# Allegro board WEGUI_XX32F103C8XX_Allegro174.brd
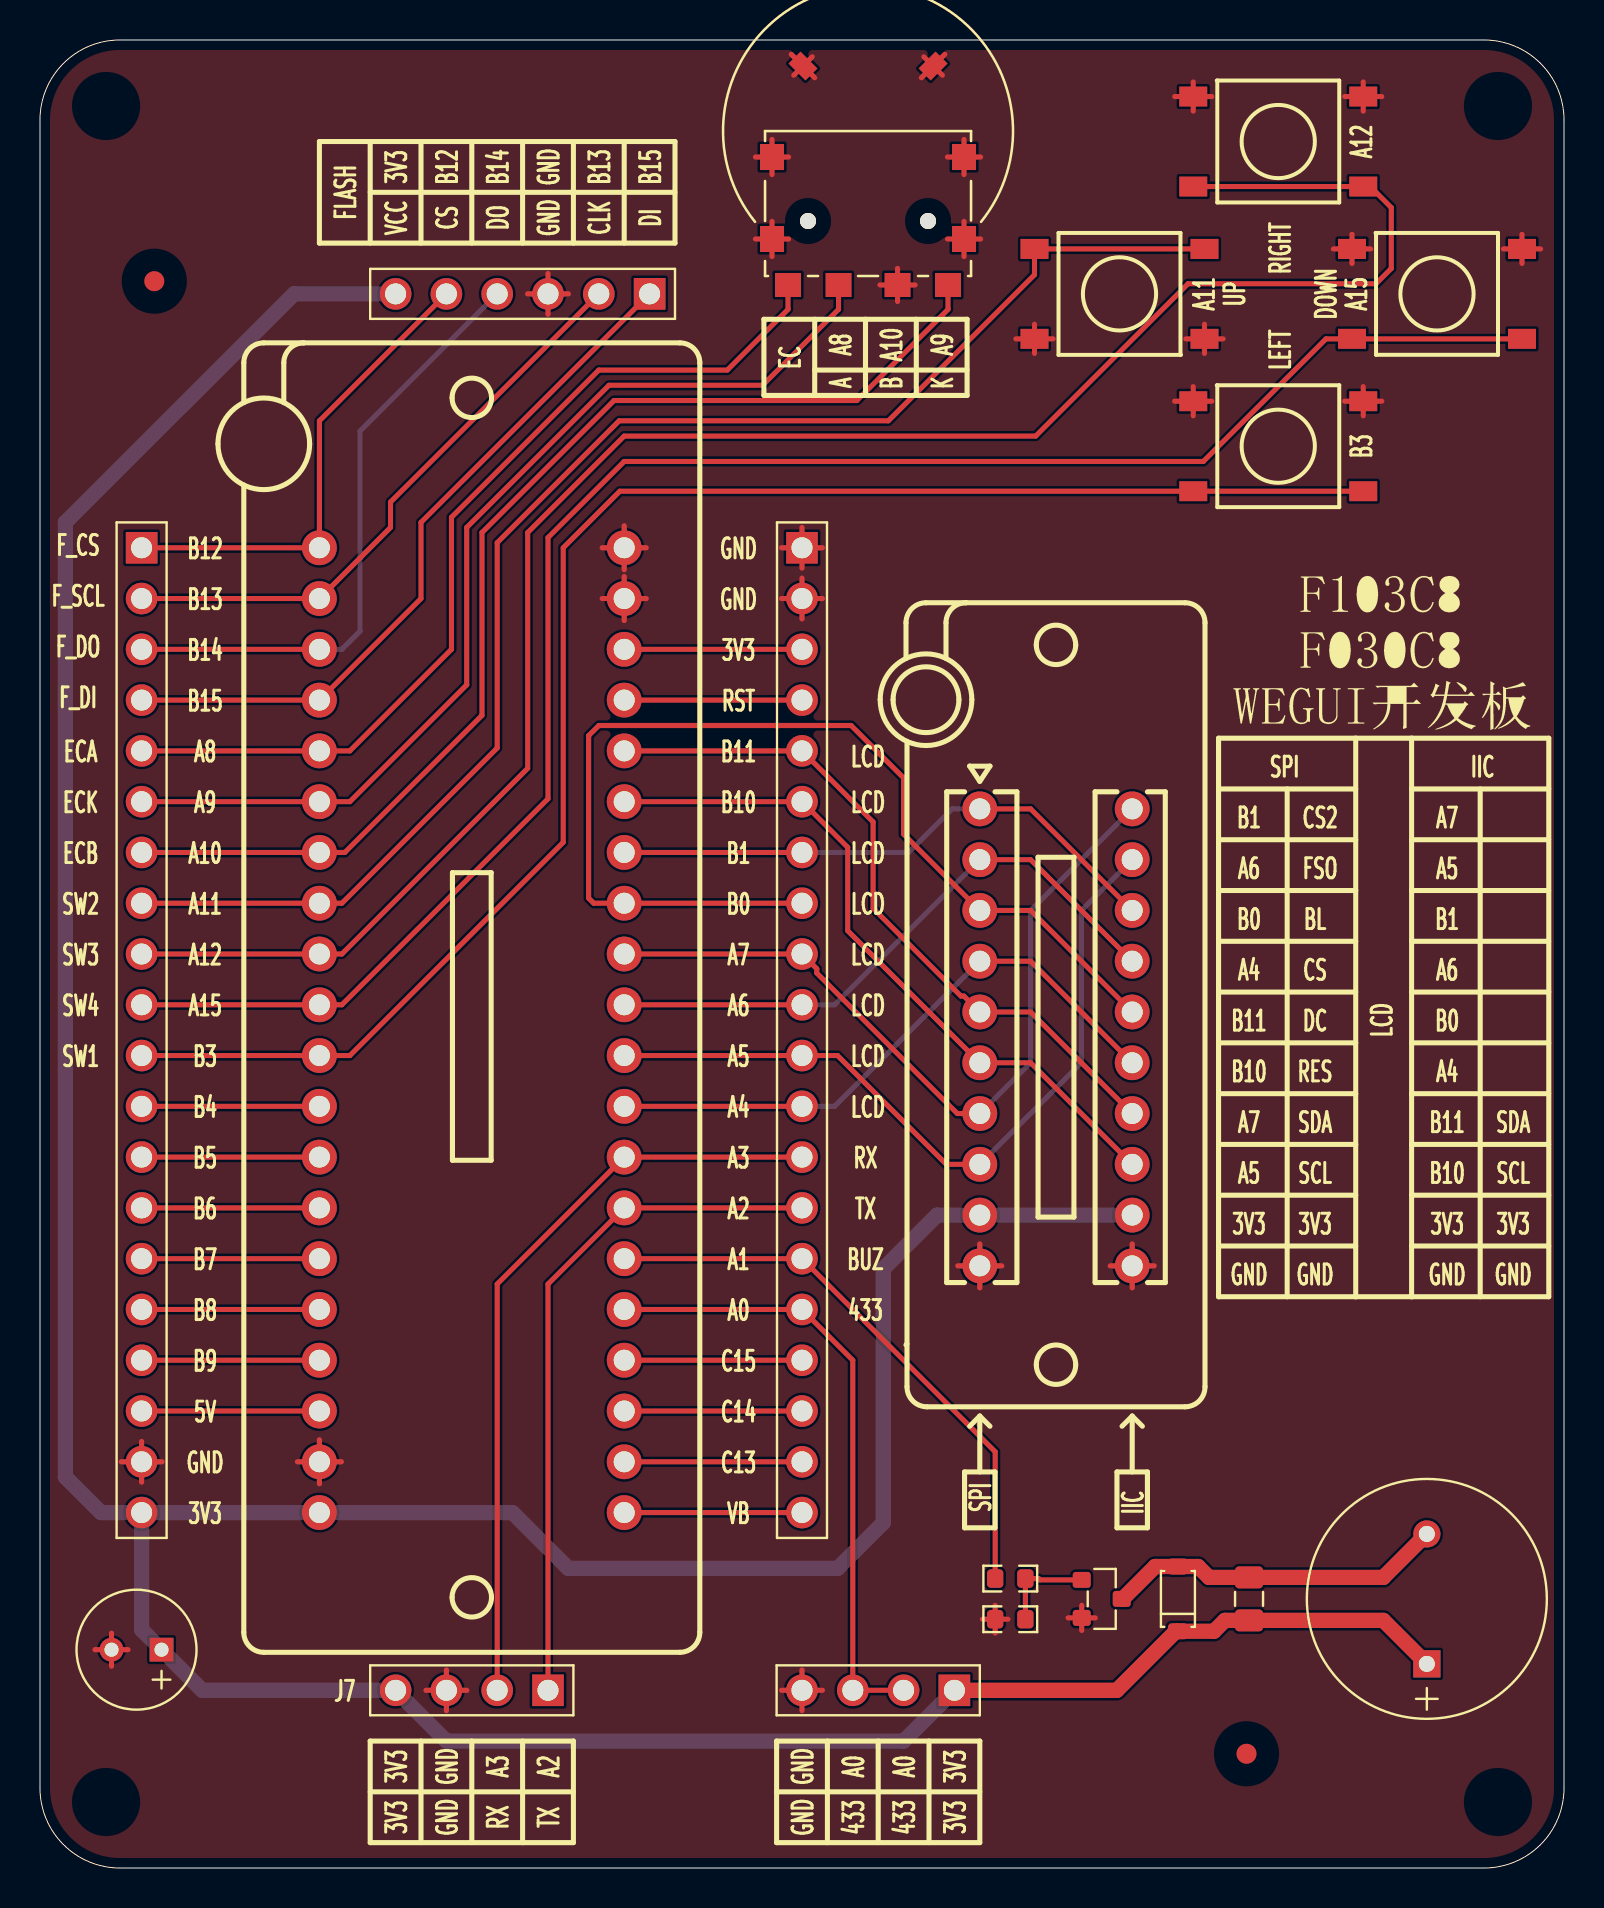
[diagram p0: board, top side]
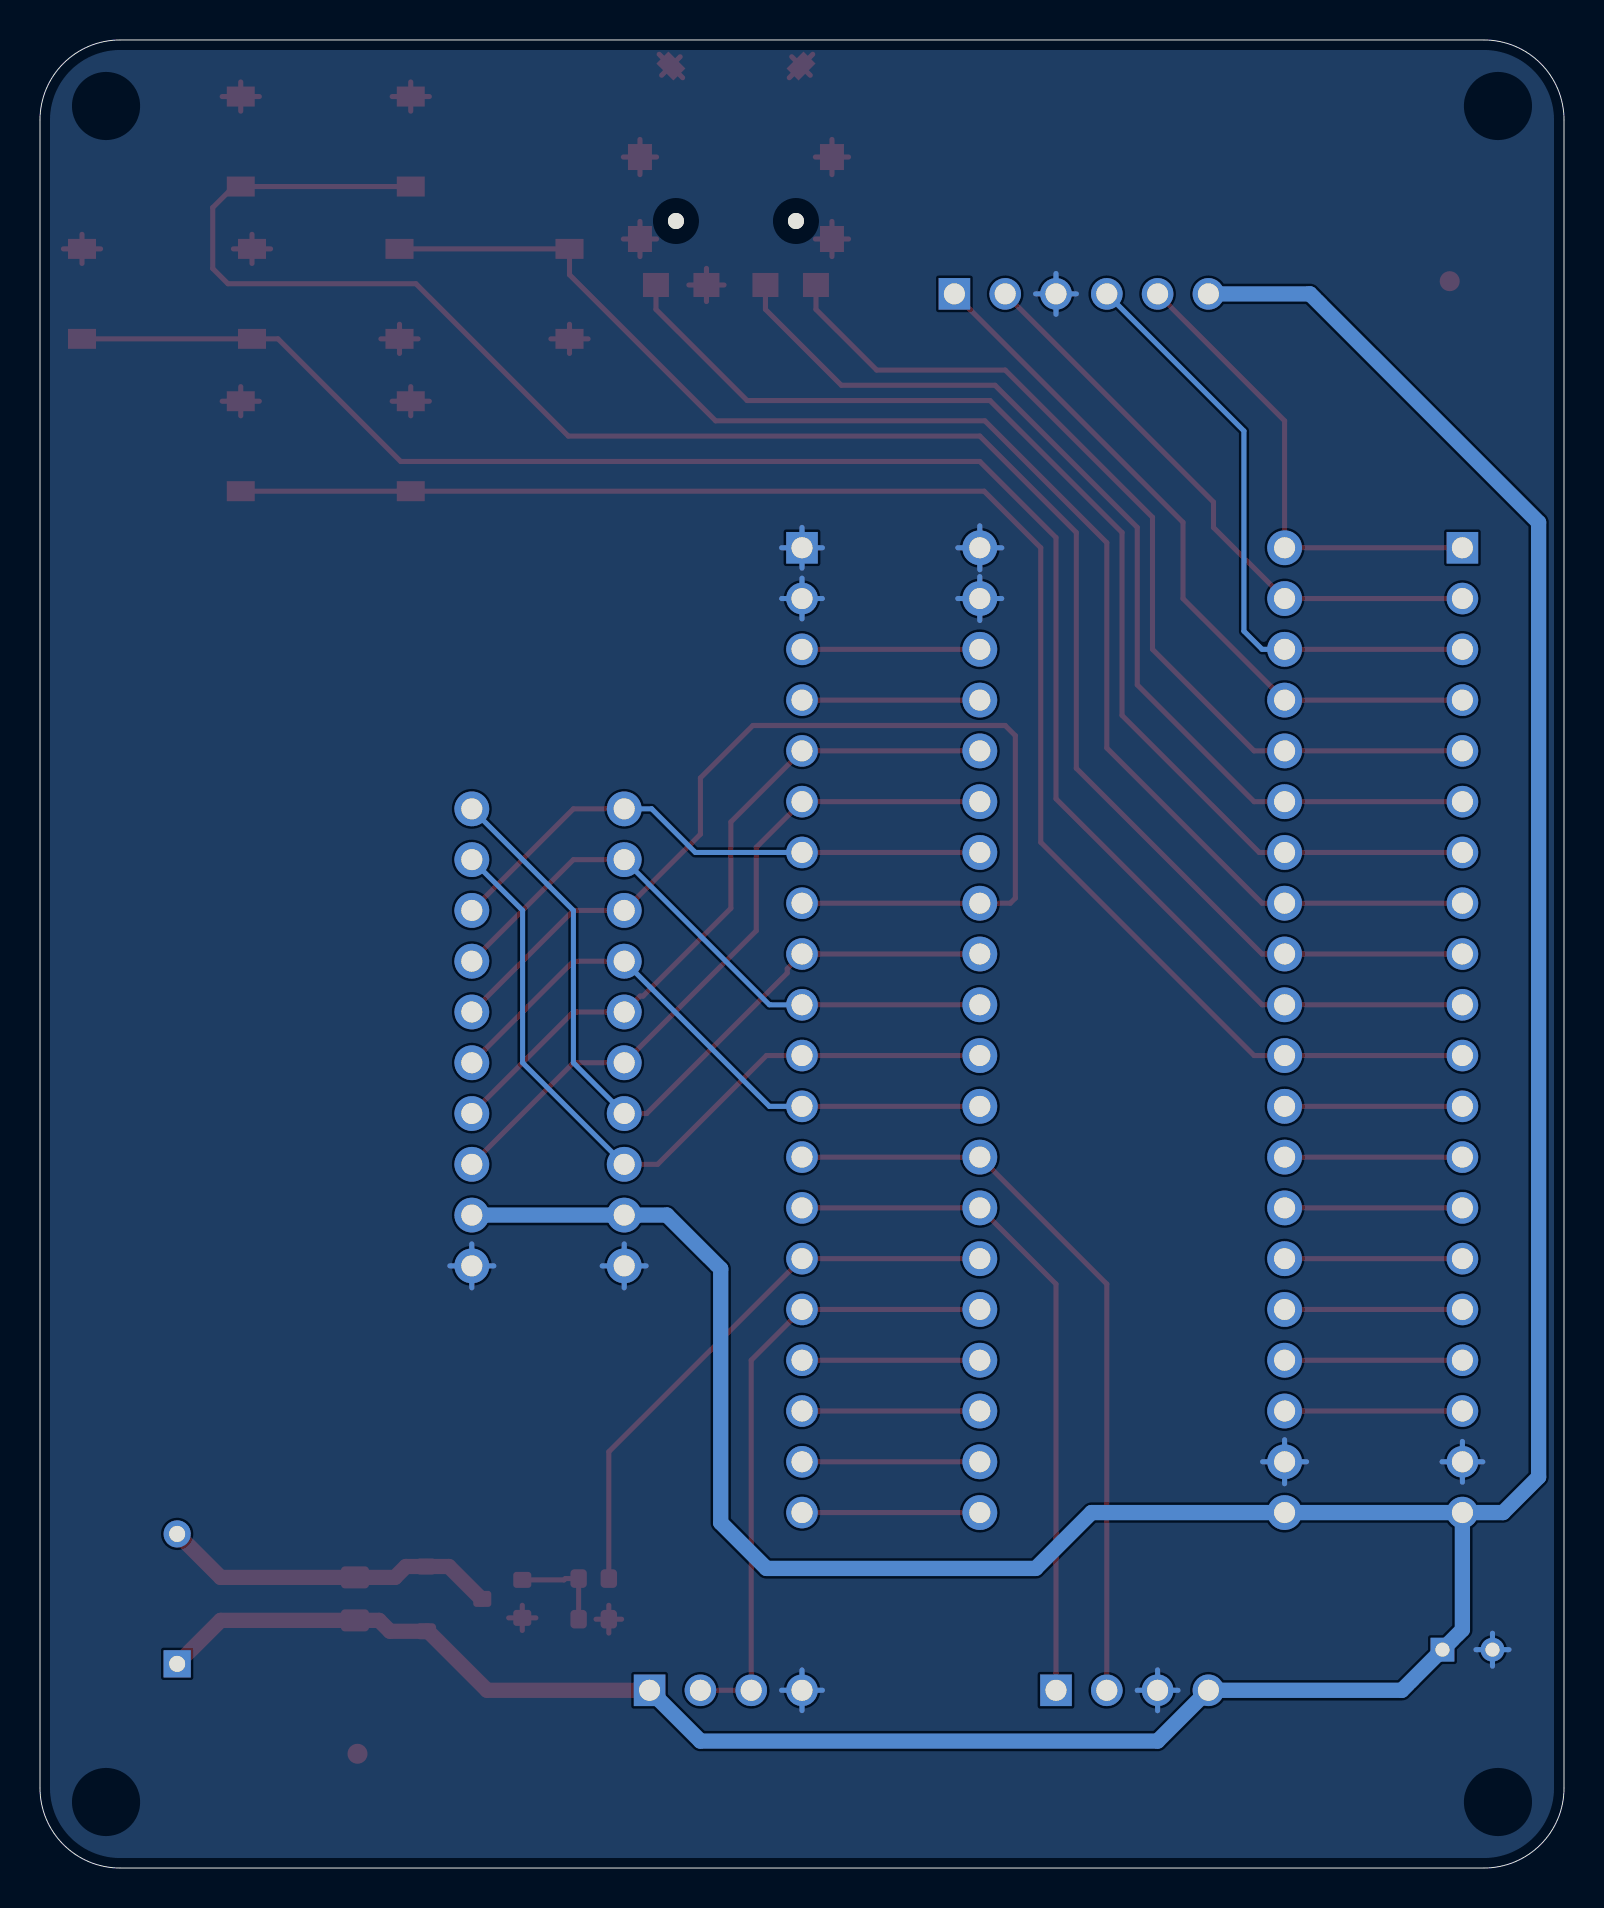
[diagram p1: board, bottom side, seen from below]

Outline 76.2 x 91.44 mm; copper layers: TOP, BOTTOM. Coordinates in mm from the lower left corner of the outline.
Outline path: 0,87.44 arc(1.17,90.27) 4,91.44 72.2,91.44 arc(75.03,90.27) 76.2,87.44 76.2,4 arc(75.03,1.17) 72.2,0 4,0 arc(1.17,1.17) 0,4 0,87.44

## Design rules (mm)
constraint set DEFAULT: min track width 0.203

## Placement (name value [footprint] x y rotation side)
C1  100uF  [C-P2R5-PD0R5-D6R3X11R5-V-TM]  4.83 10.92 180 top
D1  1N4148W  [SOD-123]  56.9 13.46 90 top
E1  SIQ-02FVS3-360  [EC-SIQ_02FVS3_360]  41.4 86.88 0 top
J1  FLASH  [HDR-1X6-2R54-TM-VM]  30.48 78.74 180 top
J2  HDR-1X20-2R54-TM-VM-(Au)  [HDR-1X20-2R54-TM-VM]  5.08 66.04 270 top
J3  xx32F103x8  [IC_LOCKING_SEAT-P2R54-40P-PW7R1]  21.59 43.54 0 top
J4  HDR-1X20-2R54-TM-VM-(Au)  [HDR-1X20-2R54-TM-VM]  38.1 66.04 270 top
J5  LCD  [IC_LOCKING_SEAT-P2R54-20P-PW3R6]  50.8 43.18 0 top
J6  433/315  [HDR-1X4-2R54-TM-VM]  45.72 8.89 180 top
J7  UART  [HDR-1X4-2R54-TM-VM]  25.4 8.89 180 top
NOREF  -  [unnamed]  5.71 79.38 0 top
NOREF#2  -  [#2]  67.06 60.96 0 top
NOREF#3  -  [unnamed#2]  72.9 3.3 0 top
NOREF#4  -  [unnamed#2]  3.3 3.3 0 top
NOREF#5  -  [unnamed]  60.33 5.72 0 top
NOREF#6  -  [unnamed#2]  3.3 88.14 0 top
NOREF#7  -  [#2]  67.06 63.75 0 top
NOREF#8  -  [#2]  67.06 58.17 0 top
NOREF#9  -  [unnamed#2]  72.9 88.14 0 top
Q1  S8050  [SOT-23-3]  53.09 13.46 270 top
R1  47R/NC  [R-0805-FENGHUA]  60.45 13.46 90 top
R2  1k  [R-0603-FENGHUA]  48.51 14.48 0 top
R3  10k  [R-0603-FENGHUA]  48.51 12.45 180 top
SP1  3V_Passive  [BUZZER-P6R5-D12X6]  69.34 13.46 90 top
SW1  6x6x4R3-SM  [KEY-4-6X6X4R3-SM-V]  61.91 71.12 180 top
SW2  6x6x4R3-SM  [KEY-4-6X6X4R3-SM-V]  53.98 78.74 0 top
SW3  6x6x4R3-SM  [KEY-4-6X6X4R3-SM-V]  61.91 86.36 180 top
SW4  6x6x4R3-SM  [KEY-4-6X6X4R3-SM-V]  69.85 78.74 180 top

## Library data of the parts
C1 = CAPACITOR POL
D1 = DIODE AC
E1 = EC-AKGBSSSSSS
J1 = CON6_1
J2 J4 = CON20
J3 = IC-LOCKING-SEAT-40P_2
J5 = IC-LOCKING-SEAT-20P_4
J6 J7 = CON4
Q1 = NPN BEC
R1-R3 = R2
SP1 = BUZZER 12
SW1-SW4 = SW PUSHBUTTON-SPST-2

## Footprints (pads in the part's own frame, mm; a bottom-side part is the same pattern mirrored in y, then rotated)
BUZZER-P6R5-D12X6
  rect 1.36x1.36 hole 0.8: 1(-3.25,0)
  round 1.36 hole 0.8: 2(3.25,0)
C-P2R5-PD0R5-D6R3X11R5-V-TM
  rect 1.19x1.19 hole 0.7: 1(-1.25,0)
  round 1.19 hole 0.7: 2(1.25,0)
EC-SIQ_02FVS3_360
  round 0.8 hole 1.6 unplated: (-3,-4.5) (3,-4.5)
  rect 1.3x1.2 smd: 1(-4,-7.7) 2(-1.475,-7.7) 3(1.475,-7.7) 4(4,-7.7)
  rect 1.2x1.3 smd: 5(-4.8,-5.4) 6(4.8,-5.4) 7(-4.8,-1.3) 8(4.8,-1.3)
  rect 0.85x1.2 smd rot 45: 9(-3.253,3.253)
  rect 0.85x1.2 smd rot 135: 10(3.253,3.253)
HDR-1X4-2R54-TM-VM
  rect 1.58x1.58 hole 1.05: 1(0,0)
  round 1.58 hole 1.05: 2(2.54,0) 3(5.08,0) 4(7.62,0)
HDR-1X6-2R54-TM-VM
  rect 1.58x1.58 hole 1.05: 1(0,0)
  round 1.58 hole 1.05: 2(2.54,0) 3(5.08,0) 4(7.62,0) 5(10.16,0) 6(12.7,0)
HDR-1X20-2R54-TM-VM
  rect 1.58x1.58 hole 1.05: 1(0,0)
  round 1.58 hole 1.05: 2(2.54,0) 3(5.08,0) 4(7.62,0) 5(10.16,0) 6(12.7,0) 7(15.24,0) 8(17.78,0) 9(20.32,0) 10(22.86,0) 11(25.4,0) 12(27.94,0) 13(30.48,0) 14(33.02,0) 15(35.56,0) 16(38.1,0) 17(40.64,0) 18(43.18,0) 19(45.72,0) 20(48.26,0)
IC_LOCKING_SEAT-P2R54-20P-PW3R6
  round 1.74 hole 1.05: 1(-3.81,9.8) 2(-3.81,7.26) 3(-3.81,4.72) 4(-3.81,2.18) 5(-3.81,-0.36) 6(-3.81,-2.9) 7(-3.81,-5.44) 8(-3.81,-7.98) 9(-3.81,-10.52) 10(-3.81,-13.06) 11(3.81,-13.06) 12(3.81,-10.52) 13(3.81,-7.98) 14(3.81,-5.44) 15(3.81,-2.9) 16(3.81,-0.36) 17(3.81,2.18) 18(3.81,4.72) 19(3.81,7.26) 20(3.81,9.8)
IC_LOCKING_SEAT-P2R54-40P-PW7R1
  round 1.74 hole 1.05: 1(-7.62,22.5) 2(-7.62,19.96) 3(-7.62,17.42) 4(-7.62,14.88) 5(-7.62,12.34) 6(-7.62,9.8) 7(-7.62,7.26) 8(-7.62,4.72) 9(-7.62,2.18) 10(-7.62,-0.36) 11(-7.62,-2.9) 12(-7.62,-5.44) 13(-7.62,-7.98) 14(-7.62,-10.52) 15(-7.62,-13.06) 16(-7.62,-15.6) 17(-7.62,-18.14) 18(-7.62,-20.68) 19(-7.62,-23.22) 20(-7.62,-25.76) 21(7.62,-25.76) 22(7.62,-23.22) 23(7.62,-20.68) 24(7.62,-18.14) 25(7.62,-15.6) 26(7.62,-13.06) 27(7.62,-10.52) 28(7.62,-7.98) 29(7.62,-5.44) 30(7.62,-2.9) 31(7.62,-0.36) 32(7.62,2.18) 33(7.62,4.72) 34(7.62,7.26) 35(7.62,9.8) 36(7.62,12.34) 37(7.62,14.88) 38(7.62,17.42) 39(7.62,19.96) 40(7.62,22.5)
KEY-4-6X6X4R3-SM-V
  rect 1.4x1 smd: 1(-4.25,2.25) 2(4.25,2.25) 3(-4.25,-2.25) 4(4.25,-2.25)
R-0603-FENGHUA
  custom 0.82x0.929 smd: 1(-0.755,0) 2(0.755,0)
R-0805-FENGHUA
  custom 1.1x1.4 smd: 1(-1.075,0) 2(1.075,0)
SOD-123
  custom 0.8x1 smd: A(1.62,0) C(-1.62,0)
SOT-23-3
  custom 0.8x0.9 smd: 1(-0.95,-1) 2(0.95,-1) 3(0,1)
unnamed
  round 1 smd: (0,0)
unnamed#2
  round 0 hole 3 unplated: (0,0)

## Nets
3V3: C1.1 D1.C J1.6(VCC) J2.20 J3.20 J5.9 J5.12 J6.1 J7.4 R1.1 SP1.1
GND: C1.2 E1.3 E1.5 E1.6 E1.7 E1.8 E1.9 E1.10(S6) J1.3 J2.19 J3.19 J3.39 J3.40 J4.1 J4.2 J5.10 J5.11 J6.4 J7.3 Q1.2(E) R3.2 SW1.3 SW1.4 SW2.3 SW2.4 SW3.3 SW3.4 SW4.3 SW4.4
433/315: J3.25 J4.16 J6.2 J6.3
BL: J3.33 J4.8 J5.3 J5.16
BUZ: J3.26 J4.15 R2.1
CS1: J3.29 J4.12 J5.4 J5.15
CS2: J3.34 J4.7 J5.1 J5.18
DC: J3.36 J4.5 J5.5 J5.14
ECA: E1.1 J2.5 J3.5
ECB: E1.4 J2.7 J3.7
ECK: E1.2 J2.6 J3.6
FLASH_CS: J1.5 J2.1 J3.1
FLASH_MISO: J1.4 J2.3 J3.3
FLASH_MOSI: J1.1 J2.4 J3.4
FLASH_SCL: J1.2 J2.2 J3.2
IIC_SCL: J3.35 J4.6 J5.6 J5.13
K1: J2.11 J3.11 SW1.1 SW1.2
K2: J2.8 J3.8 SW2.1 SW2.2
K3: J2.9 J3.9 SW3.1 SW3.2
K4: J2.10 J3.10 SW4.1 SW4.2
SPI_MISO: J3.31 J4.10 J5.2 J5.17
SPI_MOSI: J3.32 J4.9 J5.7 J5.20
SPI_SCK: J3.30 J4.11 J5.8 J5.19
USART1_RX: J3.28 J4.13 J7.2
USART1_TX: J3.27 J4.14 J7.1
N18256: J2.12 J3.12
N18258: J2.13 J3.13
N18260: J2.14 J3.14
N18262: J2.15 J3.15
N18264: J2.16 J3.16
N18266: J2.17 J3.17
N18268: J2.18 J3.18
N18396: J3.38 J4.3
N18398: J3.37 J4.4
N18424: J3.24 J4.17
N18426: J3.23 J4.18
N18428: J3.22 J4.19
N18430: J3.21(VB) J4.20
N54416: D1.A Q1.3 R1.2 SP1.2(-)
N54488: Q1.1 R2.2 R3.1

## Routing (per net, layer and track width the routed paths; a pad name or vN(x,y) marks a point on that pad's centre or on a via; arc(x,y) is an arc through that point)
3V3: length 214.8
  TOP w0.762: J6.1 53.84,8.89 56.8,11.84 D1.C 58.7,11.84 59.24,12.39 R1.1 67.17,12.39 SP1.1
  BOTTOM w0.762: J5.12 J5.9 44.85,32.66 42.16,29.97 42.16,17.27 39.88,14.99 26.42,14.99 23.62,17.78 J3.20 J2.20 ; J2.20 5.08,11.92 C1.1 8.11,8.89 J7.4 20.32,6.35 43.18,6.35 J6.1 ; J2.20 3.05,17.78 1.27,19.56 1.27,67.31 12.7,78.74 J1.6
GND: length 154.3
  TOP w0.254: 42.88,78.36 E1.3 ; E1.3 42,79.19 ; E1.3 43.76,79.19 ; E1.3 42.88,80.01 ; SW3.3 67.09,88.61 ; SW3.3 65.23,88.61 ; SW3.3 66.16,89.34 ; SW3.3 66.16,87.88 ; J2.19 5.08,21.34 ; J2.19 4.06,20.32 ; J2.19 6.1,20.32 ; J2.19 5.08,19.3 ; SW4.4 65.6,81.72 ; SW4.4 66.53,80.99 ; SW4.4 65.6,80.26 ; SW4.4 64.67,80.99 ; 57.3,76.49 SW2.4 ; SW2.4 58.23,75.76 ; SW2.4 58.23,77.22 ; SW2.4 59.15,76.49 ; 46.99,29.02 J5.10 ; J5.10 48.09,30.12 ; J5.10 45.89,30.12 ; J5.10 46.99,31.22 ; SW4.3 74.1,81.72 ; SW4.3 74.1,80.26 ; SW4.3 75.03,80.99 ; SW4.3 73.17,80.99 ; 37.08,63.5 J4.2 ; J4.2 38.1,62.48 ; J4.2 38.1,64.52 ; J4.2 39.12,63.5 ; Q1.2 52.09,13.14 ; Q1.2 51.41,12.51 ; Q1.2 52.09,11.88 ; Q1.2 52.76,12.51 ; 57.66,87.88 SW3.4 ; SW3.4 58.59,88.61 ; SW3.4 56.73,88.61 ; SW3.4 57.66,89.34 ; 24.38,78.74 J1.3 ; J1.3 25.4,77.72 ; J1.3 26.42,78.74 ; J1.3 25.4,79.76 ; J4.1 39.12,66.04 ; J4.1 38.1,65.02 ; J4.1 38.1,67.06 ; J4.1 37.08,66.04 ; E1.10 45.12,89.68 ; E1.10 44.07,89.55 ; E1.10 44.19,90.6 ; E1.10 45.24,90.72 ; 54.61,29.02 J5.11 ; J5.11 55.71,30.12 ; J5.11 54.61,31.22 ; J5.11 53.51,30.12 ; 56.73,73.37 SW1.4 ; SW1.4 57.66,72.64 ; SW1.4 58.59,73.37 ; SW1.4 57.66,74.1 ; SW1.3 66.16,74.1 ; SW1.3 66.16,72.64 ; SW1.3 67.09,73.37 ; SW1.3 65.23,73.37 ; 47.12,12.45 R3.2 ; R3.2 47.76,13.14 ; R3.2 48.4,12.45 ; R3.2 47.76,11.75 ; 28.11,66.04 J3.40 ; J3.40 29.21,64.94 ; J3.40 29.21,67.14 ; J3.40 30.31,66.04 ; 49.72,76.49 50.65,76.49 ; 49.72,76.49 49.72,75.76 ; 49.72,76.49 48.8,76.49 ; 49.72,76.49 49.72,77.22 ; 46.2,84.71 E1.8 ; E1.8 46.2,86.46 ; E1.8 47.03,85.58 ; E1.8 45.37,85.58 ; J7.3 21.34,8.89 ; J7.3 20.32,7.87 ; J7.3 19.3,8.89 ; J7.3 20.32,9.91 ; 37.08,8.89 J6.4 ; J6.4 38.1,7.87 ; J6.4 39.12,8.89 ; J6.4 38.1,9.91 ; E1.7 36.6,86.46 ; E1.7 37.43,85.58 ; E1.7 36.6,84.71 ; E1.7 35.77,85.58 ; E1.5 36.6,82.36 ; E1.5 35.77,81.48 ; E1.5 37.43,81.48 ; E1.5 36.6,80.61 ; E1.6 46.2,82.36 ; E1.6 47.03,81.48 ; E1.6 45.37,81.48 ; E1.6 46.2,80.61 ; C1.2 3.58,11.75 ; C1.2 2.75,10.92 ; C1.2 3.58,10.1 ; C1.2 4.4,10.92 ; E1.9 38.74,89.55 ; E1.9 38.61,90.6 ; E1.9 37.56,90.72 ; E1.9 37.69,89.68 ; 13.97,19.22 J3.19 ; J3.19 15.07,20.32 ; J3.19 12.87,20.32 ; J3.19 13.97,21.42 ; J3.39 30.31,63.5 ; J3.39 28.11,63.5 ; J3.39 29.21,62.4 ; J3.39 29.21,64.6
  BOTTOM w0.254: J5.11 55.71,30.12 ; J5.11 53.51,30.12 ; J5.11 54.61,29.02 ; J5.11 54.61,31.22 ; 37.08,63.5 J4.2 ; J4.2 38.1,62.48 ; J4.2 39.12,63.5 ; J4.2 38.1,64.52 ; J6.4 38.1,9.91 ; J6.4 38.1,7.87 ; J6.4 37.08,8.89 ; J6.4 39.12,8.89 ; 29.21,64.94 J3.40 ; J3.40 28.11,66.04 ; J3.40 29.21,67.14 ; J3.40 30.31,66.04 ; 5.08,19.3 J2.19 ; J2.19 4.06,20.32 ; J2.19 6.1,20.32 ; J2.19 5.08,21.34 ; 3.58,10.1 C1.2 ; C1.2 4.4,10.92 ; C1.2 2.75,10.92 ; C1.2 3.58,11.75 ; J4.1 39.12,66.04 ; J4.1 38.1,67.06 ; J4.1 37.08,66.04 ; J4.1 38.1,65.02 ; J5.10 48.09,30.12 ; J5.10 45.89,30.12 ; J5.10 46.99,29.02 ; J5.10 46.99,31.22 ; 25.4,77.72 J1.3 ; J1.3 26.42,78.74 ; J1.3 24.38,78.74 ; J1.3 25.4,79.76 ; 28.11,63.5 J3.39 ; J3.39 30.31,63.5 ; J3.39 29.21,62.4 ; J3.39 29.21,64.6 ; J7.3 21.34,8.89 ; J7.3 20.32,7.87 ; J7.3 19.3,8.89 ; J7.3 20.32,9.91 ; 13.97,19.22 J3.19 ; J3.19 15.07,20.32 ; J3.19 12.87,20.32 ; J3.19 13.97,21.42
433/315: length 31.5
  TOP w0.254: J3.25 J4.16 40.64,25.4 J6.3 J6.2
BL: length 53.9
  TOP w0.254: J4.8 J3.33 27.69,48.26 27.43,48.51 27.43,56.64 27.94,57.15 40.56,57.15 43.18,54.53 43.18,51.71 J5.3 49.53,47.9 J5.16
BUZ: length 28.9
  TOP w0.254: R2.1 47.76,20.82 J4.15 J3.26
CS1: length 30.5
  TOP w0.254: J5.4 49.53,45.36 J5.15 ; J4.12 J3.29
  BOTTOM w0.254: J4.12 39.73,38.1 J5.4
CS2: length 28.4
  TOP w0.254: J5.1 49.53,52.98 J5.18 ; J4.7 J3.34
  BOTTOM w0.254: J4.7 43.43,50.8 45.61,52.98 J5.1
DC: length 35.4
  TOP w0.254: J5.14 49.53,42.82 J5.5 46.2,43.61 46.05,43.61 41.66,48.01 41.66,52.32 J4.5 J3.36
ECA: length 46.6
  TOP w0.254: E1.1 37.4,77.96 34.37,74.93 27.94,74.93 20.57,67.56 20.57,60.96 15.49,55.88 J3.5 J2.5
ECB: length 58.2
  TOP w0.254: J2.7 J3.7 15.24,50.8 22.1,57.66 22.1,66.8 28.7,73.41 40.84,73.41 45.4,77.96 E1.4
ECK: length 50.9
  TOP w0.254: J2.6 J3.6 15.49,53.34 21.34,59.18 21.34,67.06 28.45,74.17 36.13,74.17 39.93,77.96 39.93,79.19
FLASH_CS: length 24.2
  TOP w0.254: J1.5 13.97,72.39 J3.1 J2.1
FLASH_MISO: length 31
  TOP w0.254: J2.3 J3.3
  BOTTOM w0.254: J3.3 15.09,60.96 16,61.87 16,71.88 J1.4
FLASH_MOSI: length 36
  TOP w0.254: J1.1 19.05,67.31 19.05,63.5 J3.4 J2.4
FLASH_SCL: length 29.9
  TOP w0.254: J2.2 J3.2 17.53,67.06 17.53,68.33 J1.2
IIC_SCL: length 35.4
  TOP w0.254: J3.35 J4.6 40.39,51.05 40.39,46.88 J5.6 49.53,40.28 J5.13
K1: length 81.4
  TOP w0.254: J2.11 J3.11 15.49,40.64 26.16,51.31 26.16,66.04 28.99,68.87 SW1.2 SW1.1
K2: length 73.5
  TOP w0.254: SW2.2 49.72,80.99 49.72,79.7 42.42,72.39 28.96,72.39 22.86,66.29 22.86,56.03 15.09,48.26 J3.8 J2.8
K3: length 97
  TOP w0.254: 66.15,84.09 66.12,84.09 66.1,84.11 SW3.2 ; 66.15,84.09 SW3.1 ; 66.15,84.09 66.53,84.09 67.56,83.06 67.56,80.01 66.8,79.25 57.4,79.25 49.78,71.63 29.21,71.63 24.38,66.8 24.38,55.01 15.09,45.72 J3.9 J2.9
K4: length 90.5
  TOP w0.254: SW4.1 SW4.2 64.3,76.49 58.17,70.36 29.21,70.36 25.4,66.55 25.4,53.49 15.09,43.18 J3.10 J2.10
SPI_MISO: length 30.5
  TOP w0.254: J5.17 49.53,50.44 J5.2 ; J4.10 J3.31
  BOTTOM w0.254: J5.2 39.73,43.18 J4.10
SPI_MOSI: length 39.6
  TOP w0.254: J5.7 45.87,37.74 38.84,44.77 38.84,44.98 J4.9 J3.32
  BOTTOM w0.254: J5.20 49.53,47.9 49.53,40.28 J5.7
SPI_SCK: length 38.4
  TOP w0.254: J3.30 J4.11 39.88,40.64 45.32,35.2 J5.8
  BOTTOM w0.254: J5.19 52.07,47.9 52.07,40.28 J5.8
USART1_RX: length 38.2
  TOP w0.254: J4.13 J3.28 22.86,29.21 J7.2
USART1_TX: length 34.6
  TOP w0.254: J4.14 J3.27 25.4,29.21 J7.1
N18256: length 8.9
  TOP w0.254: J2.12 J3.12
N18258: length 8.9
  TOP w0.254: J2.13 J3.13
N18260: length 8.9
  TOP w0.254: J2.14 J3.14
N18262: length 8.9
  TOP w0.254: J2.15 J3.15
N18264: length 8.9
  TOP w0.254: J2.16 J3.16
N18266: length 8.9
  TOP w0.254: J2.17 J3.17
N18268: length 8.9
  TOP w0.254: J2.18 J3.18
N18396: length 8.9
  TOP w0.254: J4.3 J3.38
N18398: length 8.9
  TOP w0.254: J4.4 J3.37
N18424: length 8.9
  TOP w0.254: J4.17 J3.24
N18426: length 8.9
  TOP w0.254: J4.18 J3.23
N18428: length 8.9
  TOP w0.254: J4.19 J3.22
N18430: length 8.9
  TOP w0.254: J4.20 J3.21
N54416: length 17.1
  TOP w0.762: SP1.2 67.17,14.54 R1.2 58.45,14.54 57.9,15.08 D1.A 55.76,15.08 54.14,13.46 Q1.3
N54488: length 4.9
  TOP w0.254: Q1.1 50,14.41 49.93,14.48 R2.2 R3.1

## Copper pours and planes (outline as drawn; the poured copper is in the pictures)
GND on TOP, BOTTOM: 75.7,4 74.67,1.53 72.2,0.5 4,0.5 1.53,1.53 0.5,4 0.5,87.44 1.53,89.91 4,90.94 72.2,90.94 74.67,89.91 75.7,87.44

## Text on the board
Ref Des/Silkscreen Top: F_CS | F_SCL | F_DO | F_DI | ECA | ECK | ECB | SW2 | SW3 | SW4 | SW1 | B12 | B13 | B14 | B15 | A8 | A9 | A10 | A11 | A12 | A15 | B3 | B4 | B5 | B6 | B7 | B8 | B9 | 5V | GND | 3V3 | RST | B11 | B10 | B1 | B0 | A7 | A6 | A5 | A4 | A3 | A2 | A1 | A0 | C15 | C14 | C13 | VB | RX | TX | BUZ | 433 | LCD | SPI | BL | CS | DC | RES | SDA | SCL | CS2 | FSO | IIC | FLASH | VCC | DO | CLK | DI | EC | A | B | K | UP | RIGHT | LEFT | DOWN
COMPVAL_TYPE_TOP: FIGURE | FINISHED_SIZE | 0.7 | 0.8 | 1.05 | 1.6 | 3.0 | DRILL CHART: TOP to BOTTOM | ALL UNITS ARE IN MILLIMETERS | PLATED | NON-PLATED | QTY | 2 | 60 | 54 | 4
